# Altium PCB PCB1.PcbDoc
Units mil, origin at the board's own origin, x right, y up, seen from the top; angles counter-clockwise.
Board outline 685 x 1195 mil, 2 copper layers (Top Layer, Bottom Layer); 12 components, 11 nets, 47 pads, 4 vias.
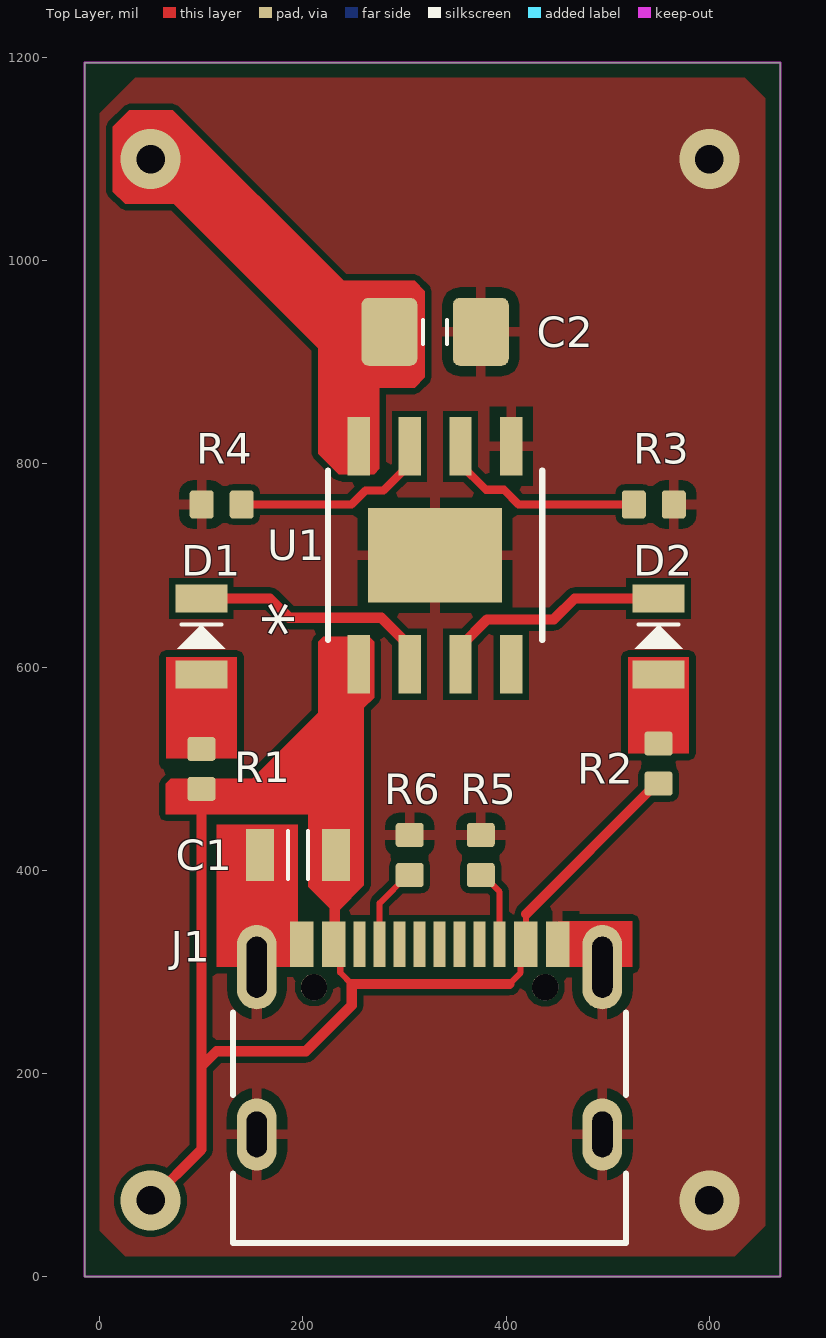
[diagram p0: Top Layer view]
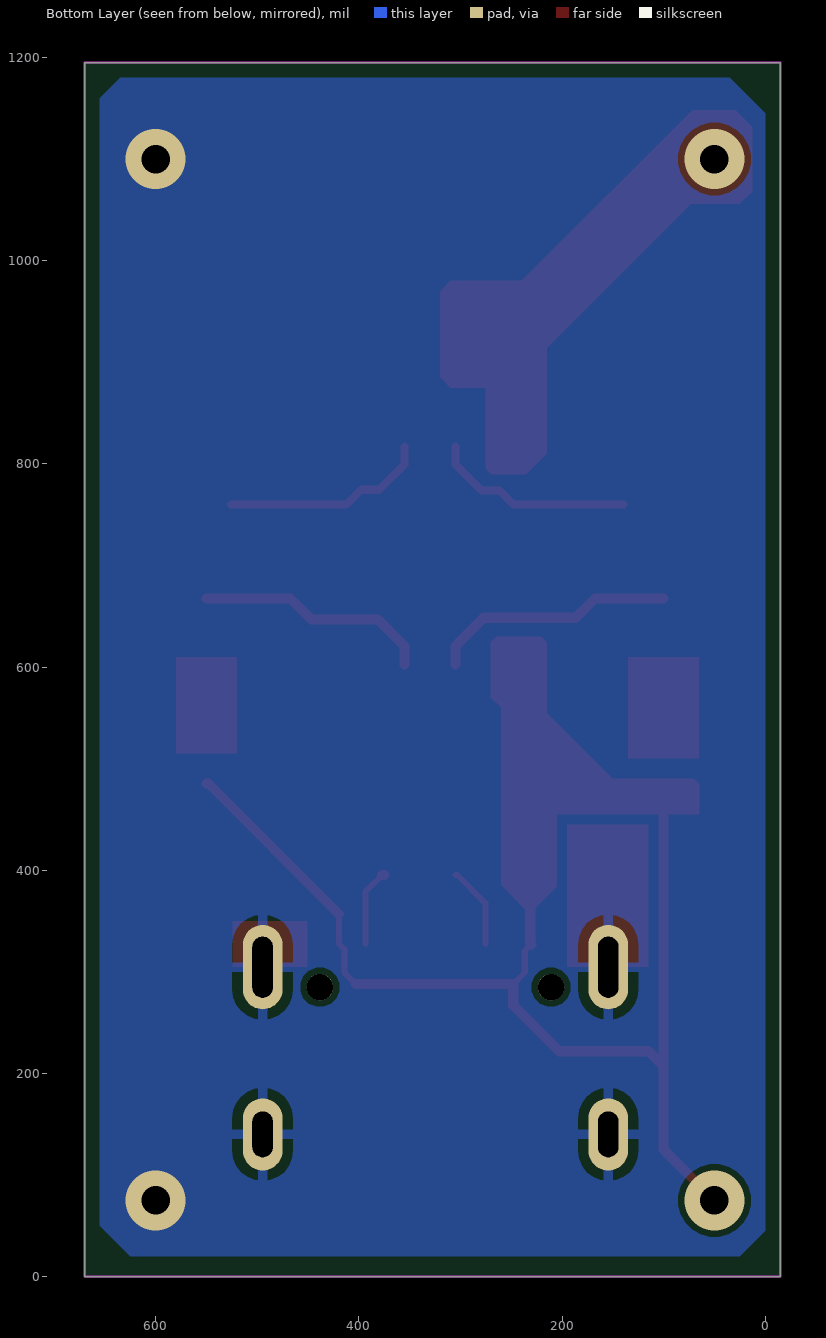
[diagram p1: Bottom Layer view, seen from below]
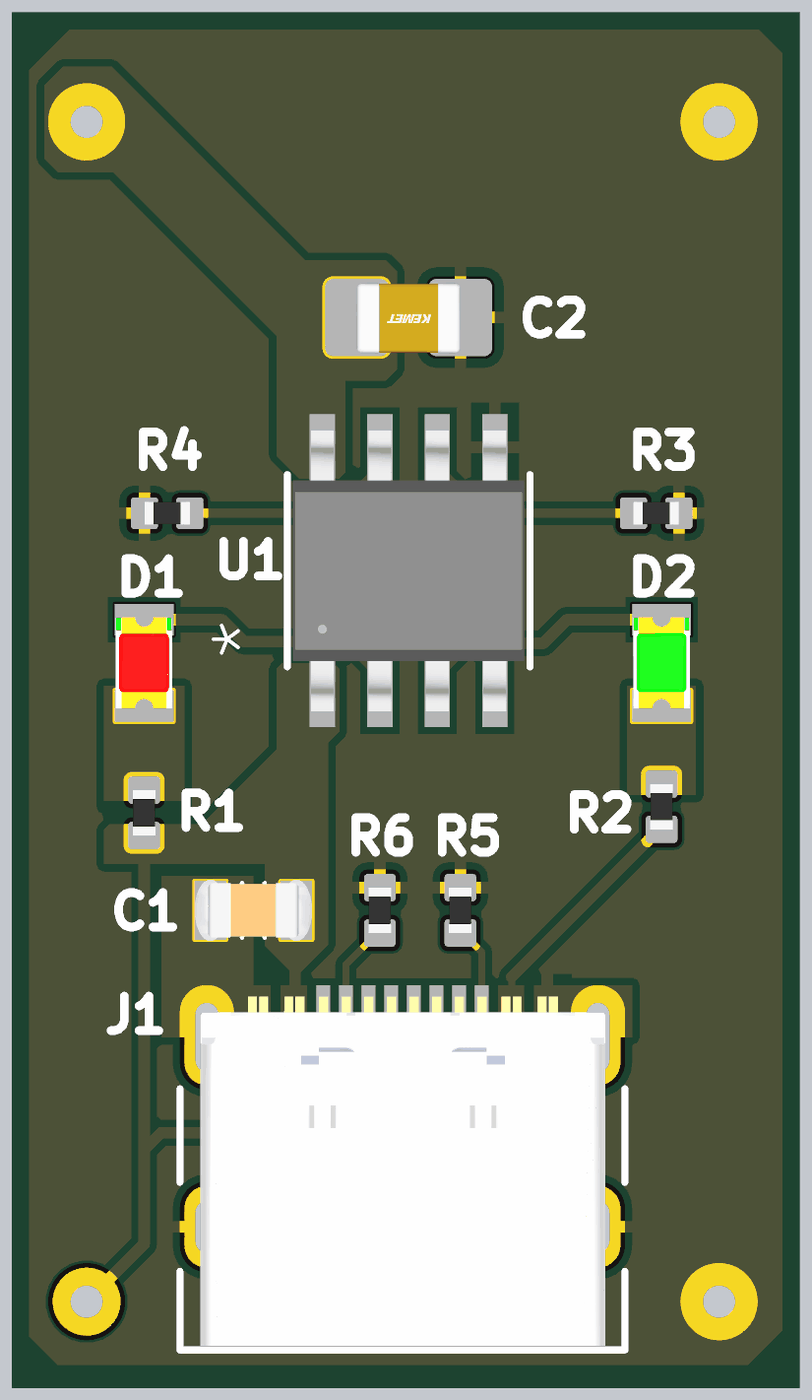
[diagram p2: 3D render of the assembled board from above, using the file's embedded part models]

## Layer stack, top to bottom
Top Solder: solder mask 0.4, Solder Resist, Dk 3.5
Top Layer: signal copper 1.4
Dielectric 1: dielectric 12.6, FR-4, Dk 4.8
Bottom Layer: signal copper 1.4
Bottom Solder: solder mask 0.4, Solder Resist, Dk 3.5

## Board outline
-15,0 670,0 670,1195 -15,1195

## Design rules (kind name [scope] priority, off if disabled: settings)
Clearance [All] p1: gap=6 ignorepadtopadclearanceinfootprint=FALSE
PolygonConnect [All] p1: connectstyle=Relief reliefconductorwidth=10 reliefentries=4 polygonreliefangle="90 Angle" airgapwidth=10
RoutingVias [All] p1: holewidth=59.06 width=78.74 viastyle="Through Hole" minholewidth=19.68 minwidth=50 maxholewidth=78.74 maxwidth=157.48
SolderMaskExpansion [All] p1: expansion=4 istentingtop=FALSE
Width [All] p1: maxlimit=10 minlimit=6 preferedwidth=8 minimp=50.000000 maximp=50.000000 favimp=50.000000
30 further rules are at their usual default settings.

## Classes and differential pairs
component class Schematic: C1 D1 D2 J1 R1 R2 R3 R4 R5 R6 U1

## Components (designator, comment, footprint, x,y, rotation, side; value= is the part's Value field where it differs from the comment)
C1 "CL21B105KBFNNNE" CAP_0805 195,415 r0 top value=1uF
C2 "2.2u" "CAP 0805" 330,930 r180 top
D1 "LS R976-NR-1" LED_RED_0805 100,630 r270 top
D2 "CMD17-21VGD/TR8" LED_GREEN_0805 550,630 r270 top
J1 "USB4105-GF-A-060" USB4105-GF-A-060 325,190.39 r0 top
R1 "2k2" RES_0402 100,499.69 r90 top
R2 "2k2" RES_0402 550,505 r90 top
R3 "10k" RES_0402 545.32,760 r180 top
R4 "1.25k" RES_0402 120,760 r0 top
R5 "5k1" RES_0402 375,415 r270 top
R6 "5k1" RES_0402 305,415 r270 top
U1 "TPB4056A20-ES1R" "ESOP-8_TPK - duplicate" 330,710 r90 top

## Footprints (in the part's own frame and the unit in brackets; to place one, negate y for a bottom-side part, rotate by r counter-clockwise, add the part's x,y. Pads: shape width x height; smd on the part's side, far side on the other; paste and mask are expansions set on the pad)
"CAP 0805" [mm]
  rrect25% 1.4x1.7 smd mask+0.06: 1(-1.143,0) 2(1.143,0)
  silkscreen extent -0.3,-0.3 0.3,0.3, body extent -1.15,-0.76 1.15,0.79, height 1.01
CAP_0805 [mm]
  rect 0.7x1.3 smd mask+0.05: 1(-0.95,0) 2(0.95,0)
  silkscreen extent -0.25,-0.6 0.25,0.6, body extent -1.3,-0.68 1.3,0.68, height 0.9
"ESOP-8_TPK - duplicate" [mil]
  rect 57.5x22 smd paste+0 mask+0: 1(-107.25,75) 2(-107.25,25) 3(-107.25,-25) 4(-107.25,-75) 5(107.25,-75) 6(107.25,-25) 7(107.25,25) 8(107.25,75)
  rect 93x132 smd paste-65.5 mask+0: 9(0,0)
  silkscreen extent -84,-106 84,106, body extent -122,-101 122,101, height 67
LED_GREEN_0805 [mm]
  rect 0.7x1.3 smd mask+0.05: 1(-0.95,0) 2(0.95,0)
  silkscreen extent -0.3,-0.6 0.3,0.6, body extent -1.01,-0.62 1.01,0.62, height 1.1
LED_RED_0805 [mm]
  rect 0.7x1.3 smd mask+0.05: 1(-0.95,0) 2(0.95,0)
  silkscreen extent -0.3,-0.6 0.3,0.6, body extent -1.01,-0.63 1.01,0.62, height 1.1
RES_0402 [mm]
  rrect25% 0.6x0.7 smd: 1(-0.5,0) 2(0.5,0)
  body extent -0.5,-0.25 0.5,0.25, height 0.3
USB4105-GF-A-060 [mil] "USB TYPE C 16P"
  round 26 / inner round 60 / far side round 26 hole 26 unplated paste-99999 mask-13: 17(-114.17,94.52) 18(113.39,94.52)
  rect 23x45 smd paste-22.5 mask-22.5: A1B12(-126.38,136.84) A4B9(-94.88,136.84) B1A12(125.59,136.84) B4A9(94.09,136.84)
  rect 12x45 smd paste+0 mask+0: A5(-49.61,136.84) A6(-10.24,136.84) A7(9.45,136.84) A8(48.82,136.84) B5(68.5,136.84) B6(29.13,136.84) B7(-29.92,136.84) B8(-69.29,136.84)
  oval 39x71 hole 20 slot 45 at 90 deg: SH(-170.47,-50.36) SH(169.69,-50.36)
  oval 39x83 hole 20 slot 60 at 90 deg: SH(-170.47,114.2) SH(169.69,114.2)
  Multi-Layer lines w24: -170.47,-65.86 -170.47,-34.86 ; -170.47,92.7 -170.47,135.7 ; 169.69,-65.86 169.69,-34.86 ; 169.69,92.7 169.69,114.2 169.69,122.52 169.69,135.7
  silkscreen extent -194,-157 193,70, body extent -176,-154 176,150, height 128

## Part data
C1: library part "CAP CER 1uF 0805", "CAP CER 1uF %10 0805", Case Code (Metric)=2012, Case Code (Imperial)=0805, Dielectric=X7R, Manufacturer=Samsung, Max Operating Temperature=125°C, Min Operating Temperature=-55°C, Package Quantity=1, Supplier Part Number=187-CL21B105KBFNNNE, Tolerance=10%, Voltage=50V, Case/Package=0805, Category="Ceramic Capacitors", ComponentLink1Description=https://datasheet.ciiva.com/25800/cl21b105kbfnnne-25800291.pdf?src-supplier=Digi-Key, ComponentLink1URL=https://datasheet.ciiva.com/25800/cl21b105kbfnnne-25800291.pdf?src-supplier=Digi-Key, Construction=Flat, Depth=1.25mm, Designed By=Osman, Height=1.25mm, Length=2mm, Manufacturer Part Number=CL21B105KBFNNNE, Material=Ceramic, Mounting Technology="Surface Mount", Packaging="Tape and Reel", Pricing="1=0,11, 10=0,045, 50=0,045, 100=0,027, 1000=0,026, 10000=0,015 (USD)", Radiation Hardening=No, RoHS=Yes, RoHS Compliant=Yes, Series=CL, Stock=126210, Supplier=Mouser, Thickness=0.053inch, Voltage Rating=50V, Voltage Rating (DC)=50V, Width=0.049inch
C2: library part "CAP CER 2.2uF 16V 0805"
D1: library part "LED RED 0805", "LED Uni-Color Super Red 645nm 2-Pin Chip 0805(2012Metric) T/R", Case Code (Metric)=2012, Case Code (Imperial)=0805, Color=Red, Forward Current=25mA, Forward Voltage=2.5V, Lens Color=White, Manufacturer="Osram Opto", Manufacturer Part Number=LSR976-NR-1, Max Operating Temperature=85°C, Min Operating Temperature=-30°C, Package Quantity=16000, Power Dissipation=65mW, Reverse Voltage=12V, Supplier Part Number=720-LSR976-NR-1, Test Current=20mA, Case/Package=0805, Category=LEDs, ComponentLink1Description=https://datasheet.ciiva.com/4688/o-ls-ly-r976-24152-4688435.pdf?src-supplier=Mouser, ComponentLink1URL=https://datasheet.ciiva.com/4688/o-ls-ly-r976-24152-4688435.pdf?src-supplier=Mouser, ComponentLink2Description=https://datasheet.ciiva.com/26920/getdatasheetpartid-568367-26920831.pdf?src-supplier=Verical, ComponentLink2URL=https://datasheet.ciiva.com/26920/getdatasheetpartid-568367-26920831.pdf?src-supplier=Verical, ComponentLink3Description=https://datasheet.ciiva.com/2112/00078896-0-2112782.pdf?src-supplier=Digi-Key, ComponentLink3URL=https://datasheet.ciiva.com/2112/00078896-0-2112782.pdf?src-supplier=Digi-Key, ComponentLink4Description=https://datasheet.ciiva.com/2112/00078896-0-2112781.pdf?src-supplier=Digi-Key, ComponentLink4URL=https://datasheet.ciiva.com/2112/00078896-0-2112781.pdf?src-supplier=Digi-Key, ComponentLink5Description=https://datasheet.ciiva.com/2112/00078896-0-2112783.pdf?src-supplier=Digi-Key, ComponentLink5URL=https://datasheet.ciiva.com/2112/00078896-0-2112783.pdf?src-supplier=Digi-Key, Depth=1.35mm, Designed By=Osman, Dominant Wavelength=633nm, Height=0.9mm, Length=2.1mm, Lens Size=1.25mm, Lens Style=Flat,Diffused,Colorless,Rectangular, Lens Transparency=Diffused, Luminous Flux=0.47lm, Luminous Intensity=180mcd, Mounting Technology="Surface Mount", Number of Elements=1, Number of LEDs=1, Packaging="Tape and Reel", Pins=2, Pricing="1=0,27, 10=0,147, 50=0,147, 100=0,063, 1000=0,05, 10000=0,038 (USD)", Radiation Hardening=No, RoHS=Yes, RoHS Compliant=Yes, Series="CHIPLED 0805", Stock=694789, Supplier=Mouser, Viewing Angle=160°, Wavelength=633nm, Width=1.25mm, Illumination Color=Red
D2: library part "LED GREEN 0805", "CML CMD17-21VGD/TR8 LED SMT 0805 2.1V 7mcd 140deg Green 3K Part of the VCC Family of Products", foward voltage=2.1V, Manufacturer="VCC CHML", Supplier Part Number=606-CMD17-21VGD, Category=LEDs, ComponentLink1Description=https://datasheet.ciiva.com/46391/719069-46391062.pdf?src-supplier=Element14, ComponentLink1URL=https://datasheet.ciiva.com/46391/719069-46391062.pdf?src-supplier=Element14, ComponentLink2Description=https://datasheet.ciiva.com/16437/cmd17-21seriessmtleds0805packagesize-16437018.pdf?src-supplier=Future+Electronics, ComponentLink2URL=https://datasheet.ciiva.com/16437/cmd17-21seriessmtleds0805packagesize-16437018.pdf?src-supplier=Future+Electronics, Manufacturer Part Number=CMD17-21VGD/TR8, Pricing="1=0,55, 10=0,358, 50=0,358, 100=0,257, 1000=0,208, 10000=0,189 (USD)", RoHS=Yes, Stock=23475, Supplier=Mouser
J1: "USB Connector, 24 Contact(s), Female, Right Angle, Solder Terminal, Locking, Receptacle", Manufacturer="Global Connector Technology", Max Operating Temperature=85°C, Min Operating Temperature=-40°C, Supplier Part Number=640-USB4105-GF-A-060, Voltage Rating=48V, Category=Connectors, ComponentLink1Description=https://datasheet.octopart.com/USB4105-GF-A-060-GCT-datasheet-166929323.pdf?src-supplier=TME, ComponentLink1URL=https://datasheet.octopart.com/USB4105-GF-A-060-GCT-datasheet-166929323.pdf?src-supplier=TME, Contact Material=153,157ConductorMaterial, Height=3.46mm, Manufacturer Part Number=USB4105-GF-A-060, Number of Contacts=12NUMBER, Orientation=5496OrientationType, Pins=16NUMBER, Pricing="1=0,81, 10=0,646, 50=0,646, 100=0,562, 1000=0,407, 10000=0,365 (USD)", RoHS=Yes, Stock=9808, Supplier=Mouser, USB Standard=6108USBStandard
R1 R2 R3 R4 R5 R6: library part RES_0402, "Resistor SMD 0402"
U1: "No Description Available", Mfr_Name=3Peak, RefDes=RefDes, Type=Type

## Via types
v1: diameter 59.06, hole 27.99, Top Layer to Bottom Layer, 4 vias

## Nets (pads, with @x,y where several pads share a name; then routed paths per layer and width w, separated by ;. In a path a pad name is that pad's centre, name@x,y a point inside that pad or via, vN(x,y) a via of type N, cw(c..) or ccw(c..) an arc to the next point about the centre after c; other vN are vias at no path point)
*CHG: D2.1 U1.3 | length 232.2
  Top Layer w10: U1.3 355,620.5 381.45,646.95 446.95,646.95 467.4,667.4 D2.1
*PPR: D1.1 U1.2 | length 242.2
  Top Layer w10: D1.1 167.6,667.4 186.5,648.5 277,648.5 305,620.5 U1.2
+5V: C1.2 J1.A4B9 J1.B4A9 R1.1 R2.1 U1.1 | length 1169.3
  Top Layer w6: J1.A4B9 236.71,320.65 236.71,299.35 248.06,288 ; 403,288 414.25,299.25 414.25,322.39 419.57,327.71 419.57,356.85
  Top Layer w10: v1(50,75) 100,125 100,207 ; R1.1 100,207 ; J1.A4B9 231.26,328.38 231.26,413.86 C1.2 ; 403,288 248.06,288 248.06,267.06 202.82,221.82 114.82,221.82 100,207 ; 419.57,356.85 548.03,485.31 R2.1
Battery: C2.2 U1.8
  other v1: 50,1100
CC1: J1.A5 R6.2 | length 81.5
  Top Layer w6: J1.A5 275.39,367.68 303.03,395.31 R6.2
CC2: J1.B5 R5.2 | length 76.9
  Top Layer w6: R5.2@376.97,395.31 393.5,378.78 J1.B5
  Top Layer w10: R5.2 R5.2@376.97,395.31
GND: C1.1 C2.1 J1.A1B12 J1.B1A12 J1.SH R3.1 R4.1 R5.1 R6.1 U1.5 U1.9 | length 28.6
  Top Layer w8: J1.SH@480.37,327.24 494.69,312.92 J1.SH@494.69,304.6
  other v1: 600,75 600,1100
IMIN: R3.2 U1.6 | length 204.7
  Top Layer w8: U1.6 355,799.5 380,774.5 397.8,774.5 412.3,760 R3.2
IREF: R4.2 U1.7 | length 199.4
  Top Layer w8: R4.2 247.7,760 261.45,773.75 279.25,773.75 305,799.5 U1.7
NetD1_2: D1.2 R1.2
NetD2_2: D2.2 R2.2
pads on no net: J1.17 J1.18 J1.A6 J1.A7 J1.A8 J1.B6 J1.B7 J1.B8 U1.4

## Polygon pours and split planes (outlines as drawn)
GND on Top Layer "GND_L01_P000" (solid, remove dead copper, pour order 0): 0,1145 35,1180 635,1180 655,1160 655,50 625,20 25,20 0,45
GND on Bottom Layer "GND_L02_P002" (solid, remove dead copper, pour order 2): 0,1145 35,1180 635,1180 655,1160 655,50 625,20 25,20 0,45

## Keep-outs
Keep-Out Layer:
  lines w1.97: -15,0 388.75,0 670,0 670,1195 -15,1195 -15,0

## Other copper
Top Layer:
  rectangle net GND: 450.59,304.6 524.44,350
  rectangle net GND: 115,304.6 195,445
  rectangle net NetD1_2: 65,510 135,610
  rectangle net NetD2_2: 520,515 580,610
  region net Battery: 215,810 235,790 270,790 275,795 275,875 310,875 320,885 320,970 310,980 240,980 72,1148 29,1148 13,1132 13,1068 25,1056 73,1056 215,914
  region net +5V: 65,485 70,490 150,490 215,555 215,625 220,630 265,630 270,625 270,570 260,560 260,385 235,360 229,360 205,384 205,455 65,455

## Text inside footprints (layer, text, board x,y; h text height)
U1: Mechanical 13 "*" at 282.5,634 h50 r90; Top Overlay "*" at 210.41,629.59 h50 r90